# Altium PCB neigeMegaShield.PcbDoc
Units mil, origin at the board's own origin, x right, y up, seen from the top; angles counter-clockwise.
Board outline 6000 x 4000 mil, 2 copper layers (Top Layer, Bottom Layer); 1 components, 0 nets, 98 pads, 0 vias.
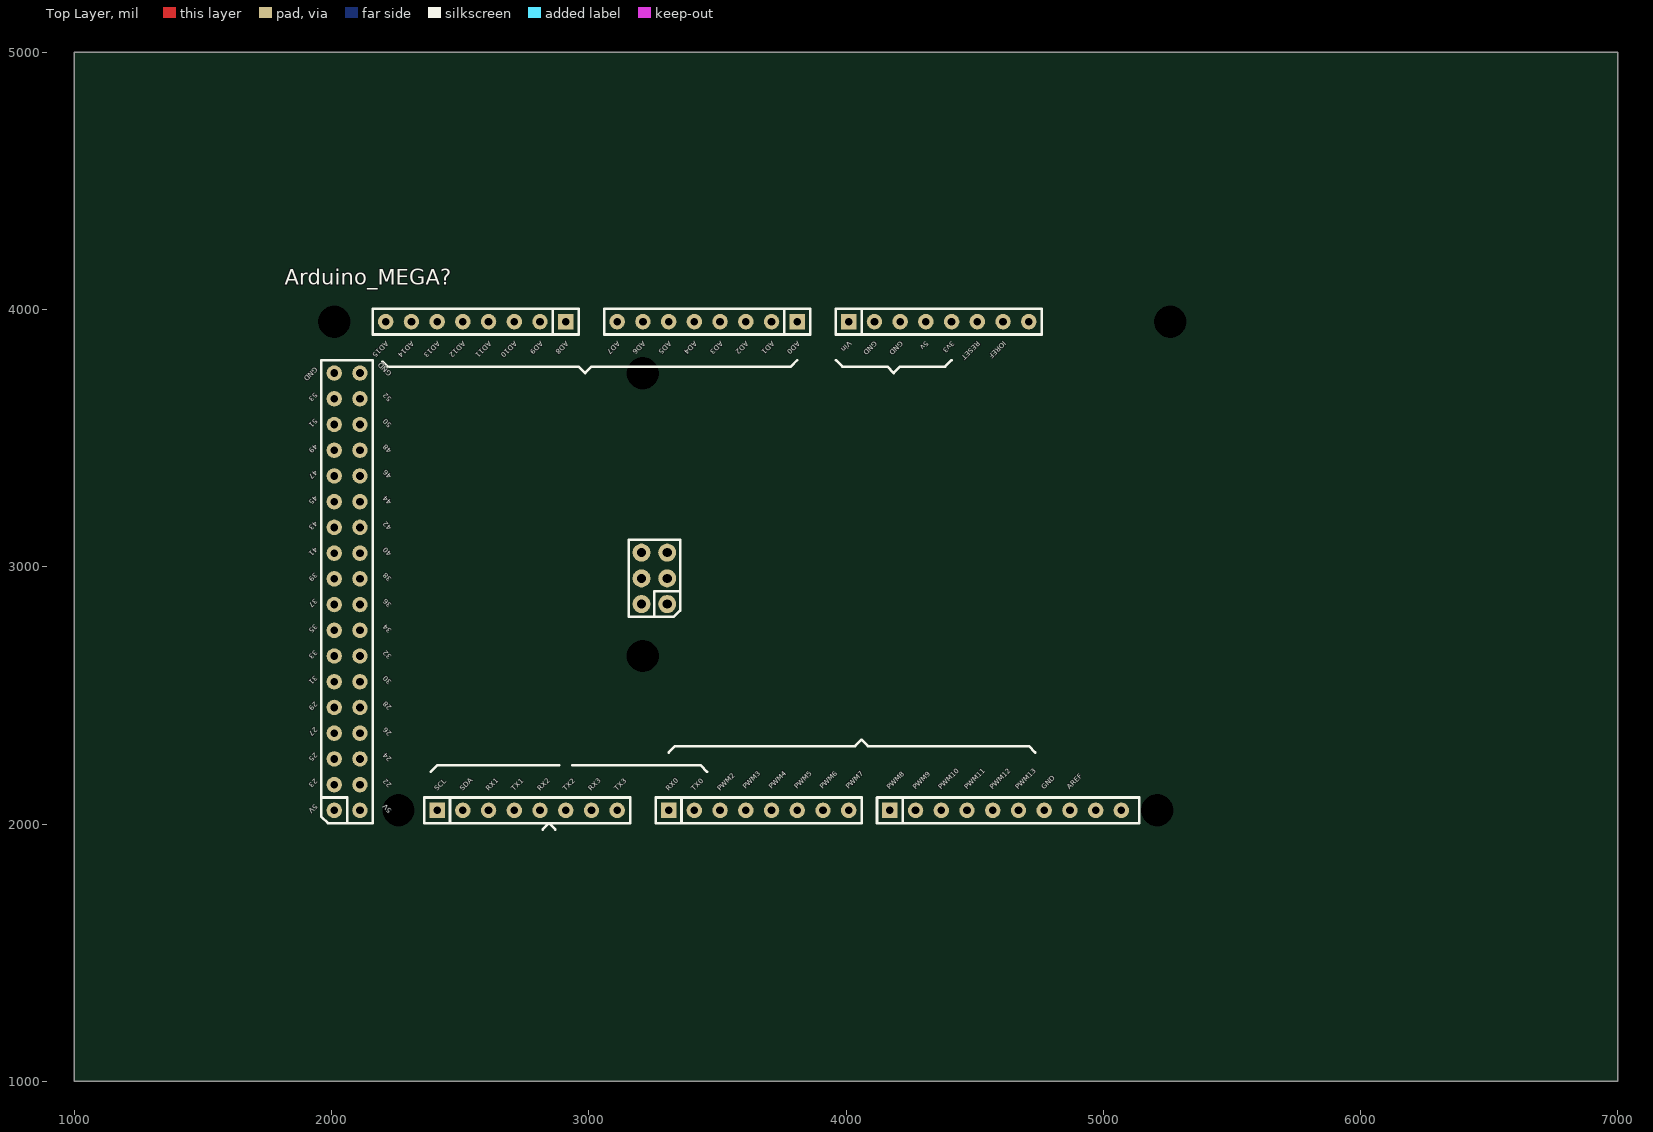
[diagram p0: Top Layer view]
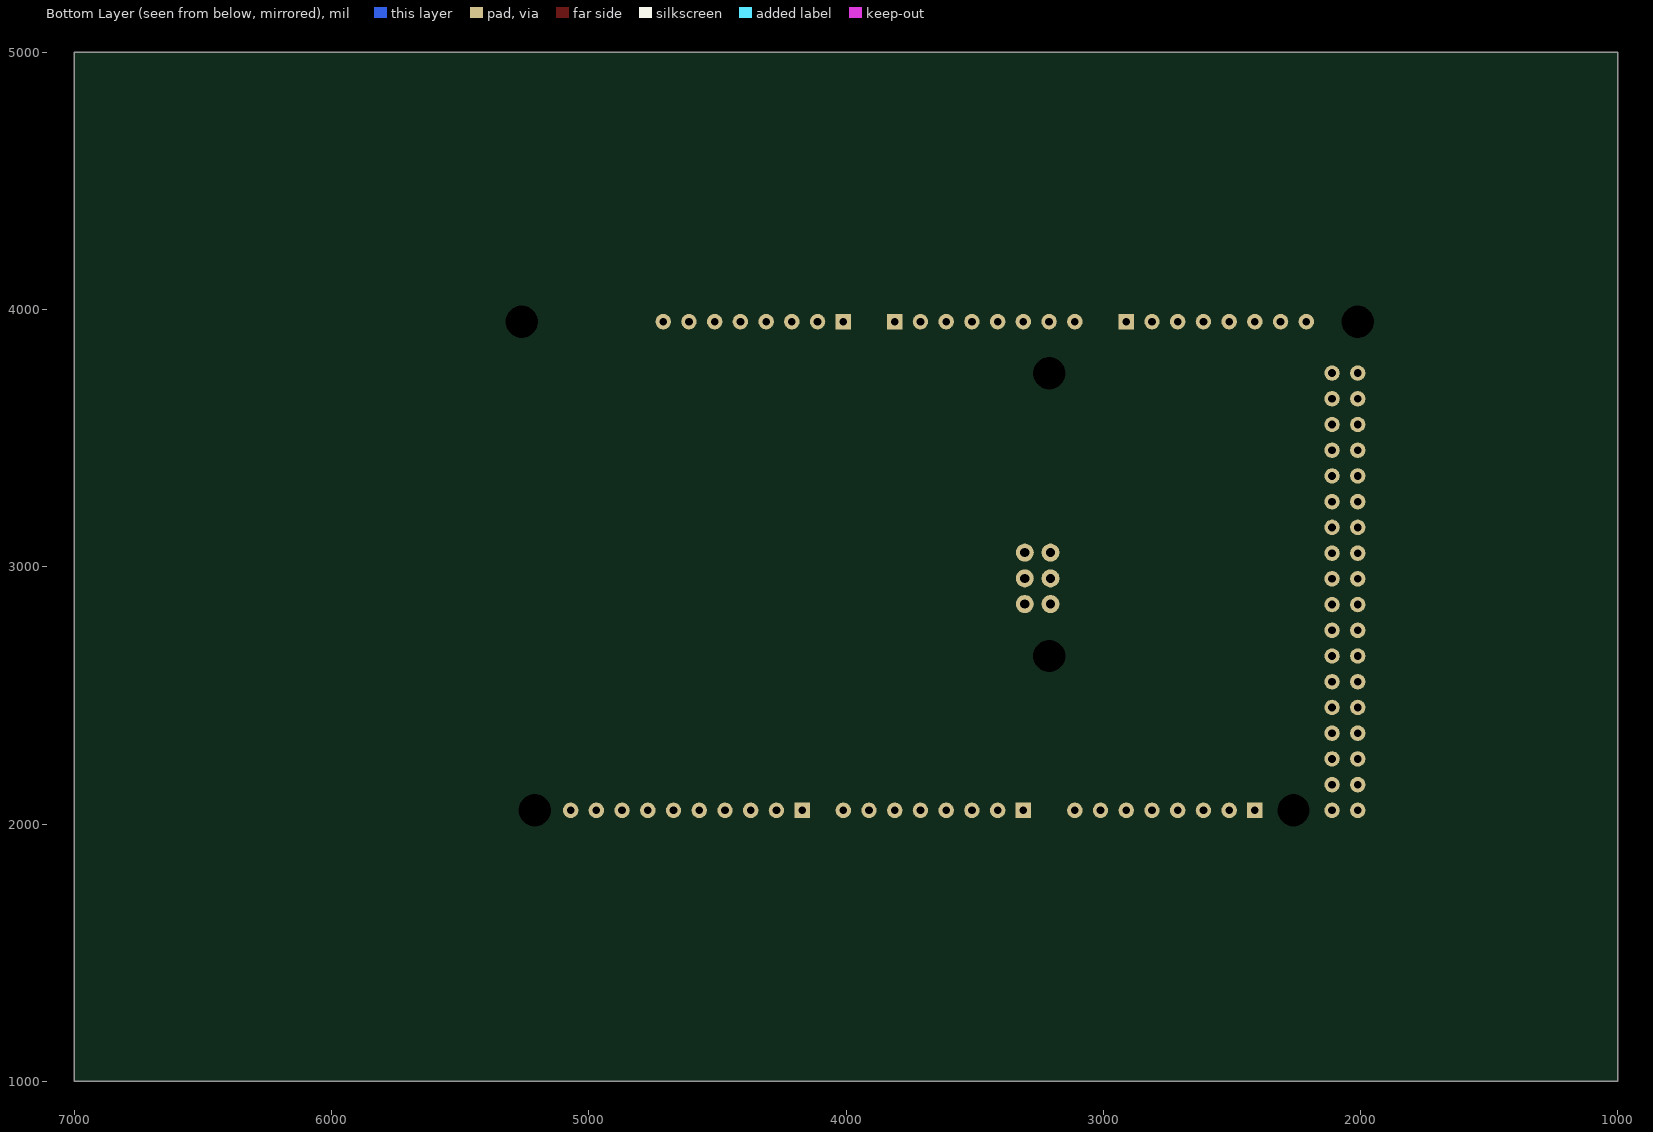
[diagram p1: Bottom Layer view, seen from below]

## Layer stack, top to bottom
Top Solder: solder mask 0.4, Solder Resist, Dk 3.5
Top Layer: signal copper 1.4
Dielectric 1: dielectric 12.6, FR-4, Dk 4.8
Bottom Layer: signal copper 1.4
Bottom Solder: solder mask 0.4, Solder Resist, Dk 3.5

## Board outline
1000,1000 7000,1000 7000,5000 1000,5000

## Design rules (kind name [scope] priority, off if disabled: settings)
Clearance [All] p1: gap=10 ignorepadtopadclearanceinfootprint=FALSE except(0: Arc-Hole Track-Hole SMDPad-Hole THPad-Hole Via-Hole Fill-Hole Poly-Hole Region-Hole Text-Hole)
PolygonConnect [All] p1: connectstyle=Relief reliefconductorwidth=10 reliefentries=4 polygonreliefangle="90 Angle" airgapwidth=10
RoutingVias [All] p1: holewidth=28 width=50 viastyle="Through Hole" minholewidth=28 minwidth=50 maxholewidth=28 maxwidth=50
SolderMaskExpansion [All] p1: expansion=4 istentingtop=FALSE
Width [All] p1: maxlimit=10 minlimit=10 preferedwidth=10
30 further rules are at their usual default settings.

## Components (designator, comment, footprint, x,y, rotation, side; value= is the part's Value field where it differs from the comment)
Arduino_MEGA? "Arduino_MEGA?" ArduinoMEGA_ALL 5810.51,4053.03 r180 top

## Footprints (in the part's own frame and the unit in brackets; to place one, negate y for a bottom-side part, rotate by r counter-clockwise, add the part's x,y. Pads: shape width x height; smd on the part's side, far side on the other; paste and mask are expansions set on the pad)
ArduinoMEGA_ALL [mil]
  round 62.99 hole 125.98: 0(550,100) 0(600,2000) 0(2600,300) 0(2600,1400) 0(3550,2000) 0(3800,100)
  round 60 hole 30: 1(1100,100) 2(1200,100) 3(1300,100) 4(1400,100) 5(1500,100) 6(1600,100) 7(1700,100) 10(2100,100) 11(2200,100) 12(2300,100) 13(2400,100) 14(2500,100) 15(2600,100) 16(2700,100) 18(3000,100) 19(3100,100) 20(3200,100) 21(3300,100) 22(3400,100) 23(3500,100) 24(3600,100) 25(3700,300) 26(3800,300) 27(3700,400) 28(3800,400) 29(3700,500) 30(3800,500) 31(3700,600) 32(3800,600) 33(3700,700) 34(3800,700) 35(3700,800) 36(3800,800) 37(3700,900) 38(3800,900) 39(3700,1000) 40(3800,1000) 41(3700,1100) 42(3800,1100) 43(3700,1200) 44(3800,1200) 45(3700,1300) 46(3800,1300) 47(3700,1400) 48(3800,1400) 49(3700,1500) 50(3800,1500) 51(3700,1600) 52(3800,1600) 53(3700,1700) 54(3800,1700) 55(3700,1800) 56(3800,1800) 57(3700,1900) 58(3800,1900) 59(3700,2000) 60(3800,2000) 62(3300,2000) 63(3200,2000) 64(3100,2000) 65(3000,2000) 66(2900,2000) 67(2800,2000) 68(2700,2000) 70(2400,2000) 71(2300,2000) 72(2200,2000) 73(2100,2000) 74(2000,2000) 75(1900,2000) 76(1800,2000) 78(1540,2000) 79(1440,2000) 80(1340,2000) 81(1240,2000) 82(1140,2000) 83(1040,2000) 84(940,2000) 85(840,2000) 86(740,2000)
  rect 60x60 hole 30: 8(1800,100) 9(2000,100) 17(2900,100) 61(3400,2000) 69(2500,2000) 77(1640,2000)
  round 70 hole 35.43: 87(2505.51,1198.03) 88(2605.51,1198.03) 89(2505.51,1098.03) 90(2605.51,1098.03) 91(2505.51,998.03) 92(2605.51,998.03)
  silkscreen extent 670,50 3850,2075, body extent 890,50 3850,2050, height 485

## Part data
Arduino_MEGA?: library part Arduino_MEGA

## Nets (pads, with @x,y where several pads share a name; then routed paths per layer and width w, separated by ;. In a path a pad name is that pad's centre, name@x,y a point inside that pad or via, vN(x,y) a via of type N, cw(c..) or ccw(c..) an arc to the next point about the centre after c; other vN are vias at no path point)
pads on no net: Arduino_MEGA?.0 Arduino_MEGA?.1 Arduino_MEGA?.2 Arduino_MEGA?.3 Arduino_MEGA?.4 Arduino_MEGA?.5 Arduino_MEGA?.6 Arduino_MEGA?.7 Arduino_MEGA?.8 Arduino_MEGA?.9 Arduino_MEGA?.10 Arduino_MEGA?.11 Arduino_MEGA?.12 Arduino_MEGA?.13 Arduino_MEGA?.14 Arduino_MEGA?.15 Arduino_MEGA?.16 Arduino_MEGA?.17 Arduino_MEGA?.18 Arduino_MEGA?.19 Arduino_MEGA?.20 Arduino_MEGA?.21 Arduino_MEGA?.22 Arduino_MEGA?.23 Arduino_MEGA?.24 Arduino_MEGA?.25 Arduino_MEGA?.26 Arduino_MEGA?.27 Arduino_MEGA?.28 Arduino_MEGA?.29 Arduino_MEGA?.30 Arduino_MEGA?.31 Arduino_MEGA?.32 Arduino_MEGA?.33 Arduino_MEGA?.34 Arduino_MEGA?.35 Arduino_MEGA?.36 Arduino_MEGA?.37 Arduino_MEGA?.38 Arduino_MEGA?.39 Arduino_MEGA?.40 Arduino_MEGA?.41 Arduino_MEGA?.42 Arduino_MEGA?.43 Arduino_MEGA?.44 Arduino_MEGA?.45 Arduino_MEGA?.46 Arduino_MEGA?.47 Arduino_MEGA?.48 Arduino_MEGA?.49 Arduino_MEGA?.50 Arduino_MEGA?.51 Arduino_MEGA?.52 Arduino_MEGA?.53 Arduino_MEGA?.54 Arduino_MEGA?.55 Arduino_MEGA?.56 Arduino_MEGA?.57 Arduino_MEGA?.58 Arduino_MEGA?.59 Arduino_MEGA?.60 Arduino_MEGA?.61 Arduino_MEGA?.62 Arduino_MEGA?.63 Arduino_MEGA?.64 Arduino_MEGA?.65 Arduino_MEGA?.66 Arduino_MEGA?.67 Arduino_MEGA?.68 Arduino_MEGA?.69 Arduino_MEGA?.70 Arduino_MEGA?.71 Arduino_MEGA?.72 Arduino_MEGA?.73 Arduino_MEGA?.74 Arduino_MEGA?.75 Arduino_MEGA?.76 Arduino_MEGA?.77 Arduino_MEGA?.78 Arduino_MEGA?.79 Arduino_MEGA?.80 Arduino_MEGA?.81 Arduino_MEGA?.82 Arduino_MEGA?.83 Arduino_MEGA?.84 Arduino_MEGA?.85 Arduino_MEGA?.86 Arduino_MEGA?.87 Arduino_MEGA?.88 Arduino_MEGA?.89 Arduino_MEGA?.90 Arduino_MEGA?.91 Arduino_MEGA?.92

## Text inside footprints (layer, text, board x,y; h text height)
Arduino_MEGA?: Top Overlay "IOREF" at 4610.51,3878.03 h20 r225; Top Overlay "RESET" at 4510.51,3878.03 h20 r225; Top Overlay "3v3" at 4410.51,3878.03 h20 r225; Top Overlay "5v" at 4310.51,3878.03 h20 r225; Top Overlay "GND" at 4210.51,3878.03 h20 r225; Top Overlay "GND" at 4110.51,3878.03 h20 r225; Top Overlay "Vin" at 4010.51,3878.03 h20 r225; Top Overlay "AD0" at 3810.51,3878.03 h20 r225; Top Overlay "AD1" at 3710.51,3878.03 h20 r225; Top Overlay "AD2" at 3610.51,3878.03 h20 r225; Top Overlay "AD3" at 3510.51,3878.03 h20 r225; Top Overlay "AD4" at 3410.51,3878.03 h20 r225; Top Overlay "AD5" at 3310.51,3878.03 h20 r225; Top Overlay "AD6" at 3210.51,3878.03 h20 r225; Top Overlay "AD7" at 3110.51,3878.03 h20 r225; Top Overlay "AD8" at 2910.51,3878.03 h20 r225; Top Overlay "AD9" at 2810.51,3878.03 h20 r225; Top Overlay "AD10" at 2710.51,3878.03 h20 r225; Top Overlay "AD11" at 2610.51,3878.03 h20 r225; Top Overlay "AD12" at 2510.51,3878.03 h20 r225; Top Overlay "AD13" at 2410.51,3878.03 h20 r225; Top Overlay "AD14" at 2310.51,3878.03 h20 r225; Top Overlay "AD15" at 2210.51,3878.03 h20 r225; Top Overlay "RX0" at 3310.51,2128.03 h20 r45; Top Overlay "SCL" at 2410.51,2128.03 h20 r45; Top Overlay "5V" at 2235.51,2053.03 h20 r135; Top Overlay "22" at 2235.51,2153.03 h20 r135; Top Overlay "24" at 2235.51,2253.03 h20 r135; Top Overlay "26" at 2235.51,2353.03 h20 r135; Top Overlay "28" at 2235.51,2453.03 h20 r135; Top Overlay "30" at 2235.51,2553.03 h20 r135; Top Overlay "32" at 2235.51,2653.03 h20 r135; Top Overlay "34" at 2235.51,2753.03 h20 r135; Top Overlay "36" at 2235.51,2853.03 h20 r135; Top Overlay "38" at 2235.51,2953.03 h20 r135; Top Overlay "40" at 2235.51,3053.03 h20 r135; Top Overlay "42" at 2235.51,3153.03 h20 r135; Top Overlay "44" at 2235.51,3253.03 h20 r135; Top Overlay "46" at 2235.51,3353.03 h20 r135; Top Overlay "48" at 2235.51,3453.03 h20 r135; Top Overlay "52" at 2235.51,3653.03 h20 r135; Top Overlay "GND" at 2235.51,3753.03 h20 r135; Top Overlay "50" at 2235.51,3553.03 h20 r135; Top Overlay "5V" at 1935.51,2078.03 h20 r225; Top Overlay "23" at 1935.51,2178.03 h20 r225; Top Overlay "25" at 1935.51,2278.03 h20 r225; Top Overlay "27" at 1935.51,2378.03 h20 r225; Top Overlay "29" at 1935.51,2478.03 h20 r225; Top Overlay "31" at 1935.51,2578.03 h20 r225; Top Overlay "33" at 1935.51,2678.03 h20 r225; Top Overlay "35" at 1935.51,2778.03 h20 r225; Top Overlay "37" at 1935.51,2878.03 h20 r225; Top Overlay "39" at 1935.51,2978.03 h20 r225; Top Overlay "41" at 1935.51,3078.03 h20 r225; Top Overlay "43" at 1935.51,3178.03 h20 r225; Top Overlay "45" at 1935.51,3278.03 h20 r225; Top Overlay "47" at 1935.51,3378.03 h20 r225; Top Overlay "49" at 1935.51,3478.03 h20 r225; Top Overlay "51" at 1935.51,3578.03 h20 r225; Top Overlay "53" at 1935.51,3678.03 h20 r225; Top Overlay "GND" at 1935.51,3778.03 h20 r225; Top Overlay "SDA" at 2510.51,2128.03 h20 r45; Top Overlay "RX1" at 2610.51,2128.03 h20 r45; Top Overlay "TX1" at 2710.51,2128.03 h20 r45; Top Overlay "RX2" at 2810.51,2128.03 h20 r45; Top Overlay "TX2" at 2910.51,2128.03 h20 r45; Top Overlay "RX3" at 3010.51,2128.03 h20 r45; Top Overlay "TX3" at 3110.51,2128.03 h20 r45; Top Overlay "TX0" at 3410.51,2128.03 h20 r45; Top Overlay "PWM2" at 3510.51,2128.03 h20 r45; Top Overlay "PWM3" at 3610.51,2135.1 h20 r45; Top Overlay "PWM4" at 3710.51,2135.1 h20 r45; Top Overlay "PWM5" at 3810.51,2135.1 h20 r45; Top Overlay "PWM6" at 3910.51,2135.1 h20 r45; Top Overlay "PWM7" at 4010.51,2135.1 h20 r45; Top Overlay "PWM8" at 4170.51,2133.03 h20 r45; Top Overlay "PWM9" at 4270.51,2133.03 h20 r45; Top Overlay "PWM10" at 4370.51,2133.03 h20 r45; Top Overlay "PWM11" at 4470.51,2133.03 h20 r45; Top Overlay "PWM12" at 4570.51,2133.03 h20 r45; Top Overlay "PWM13" at 4670.51,2133.03 h20 r45; Top Overlay "GND" at 4770.51,2133.03 h20 r45; Top Overlay "AREF" at 4870.51,2133.03 h20 r45